# Altium PCB Power Bank Circuit.pcbdoc
Units mm, origin at the board's own origin, x right, y up, seen from the top; angles counter-clockwise.
Board outline 81.06 x 94.27 mm, 2 copper layers (Top Layer, Bottom Layer); 36 components, 26 nets, 99 pads, 28 vias.
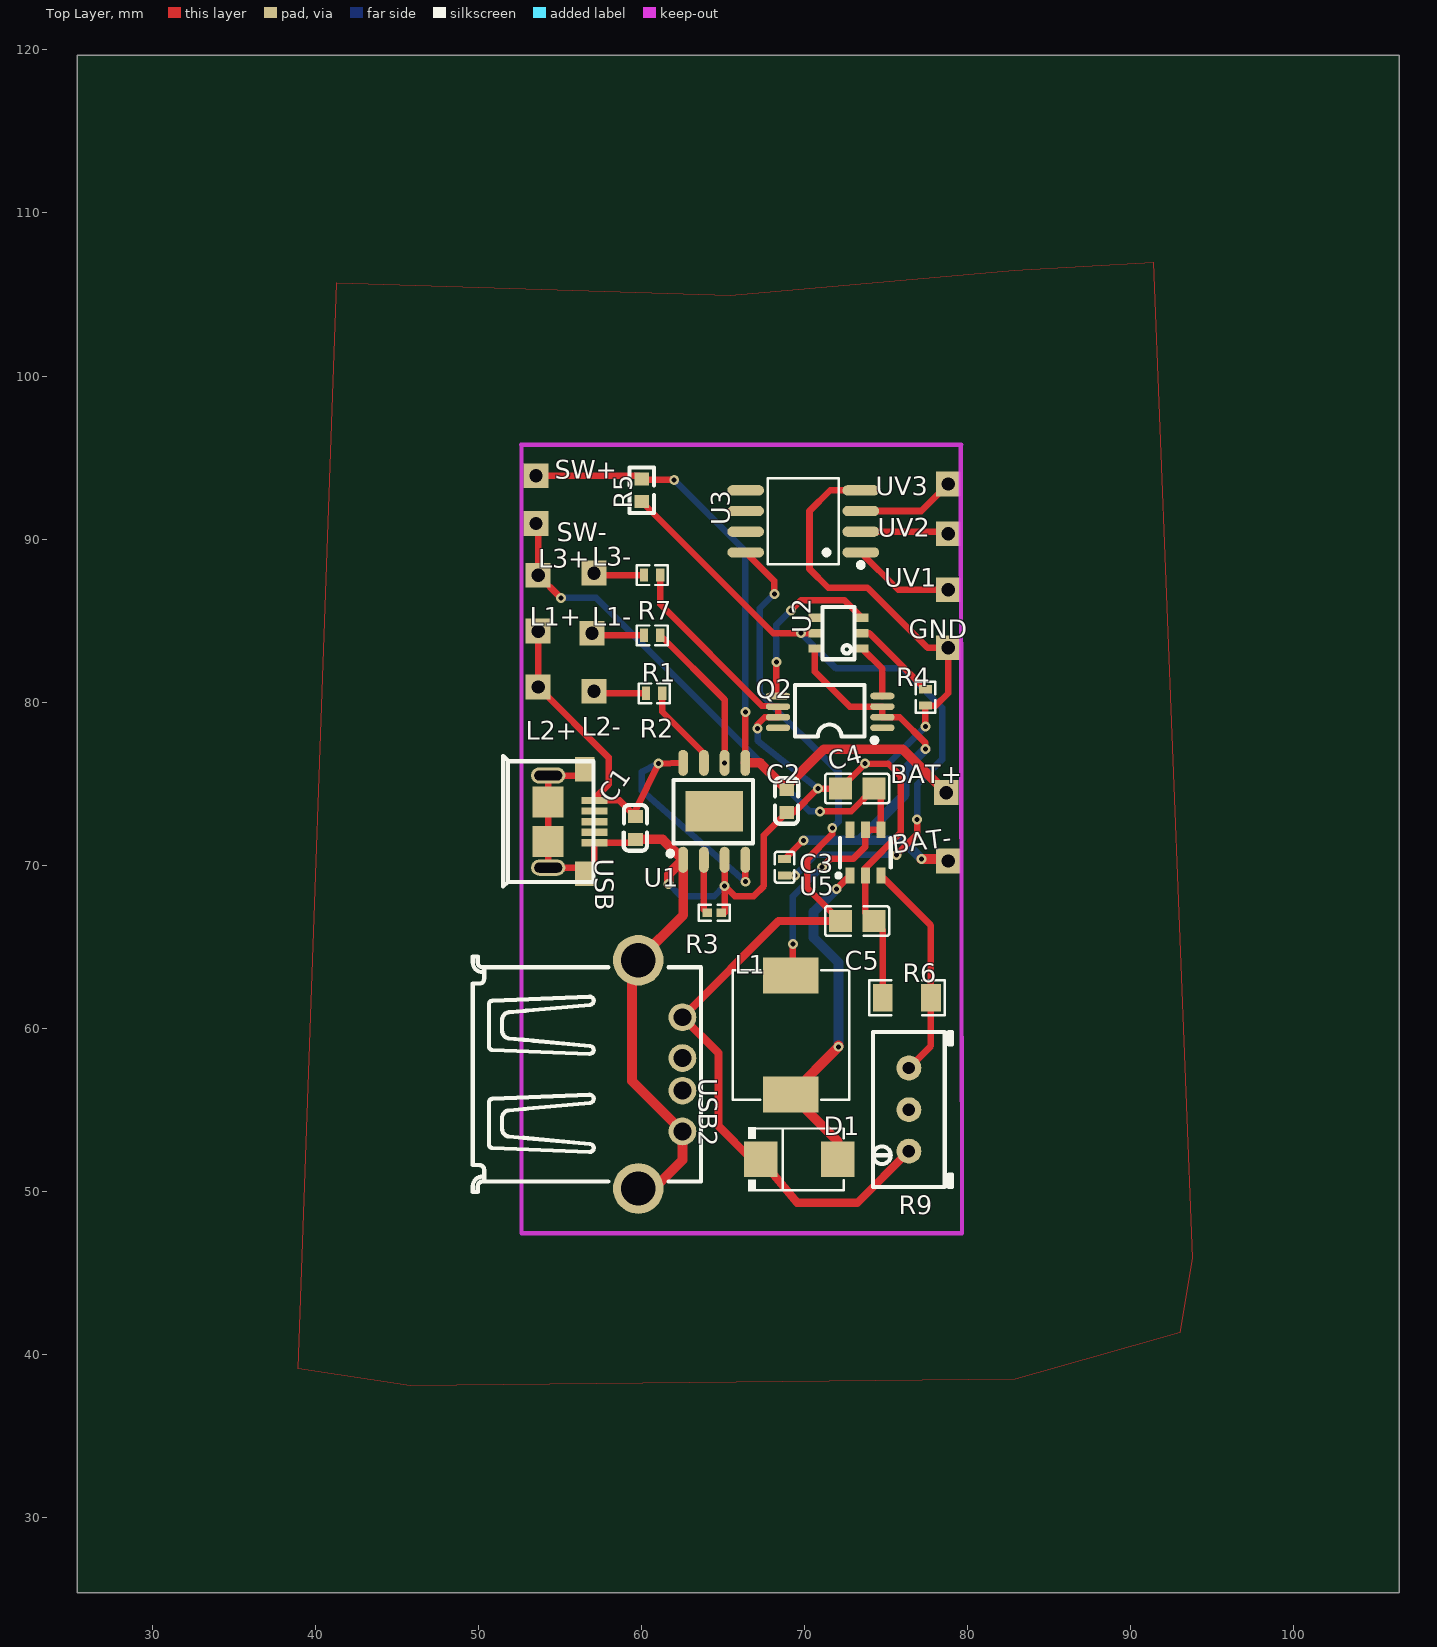
[diagram p0: Top Layer view]
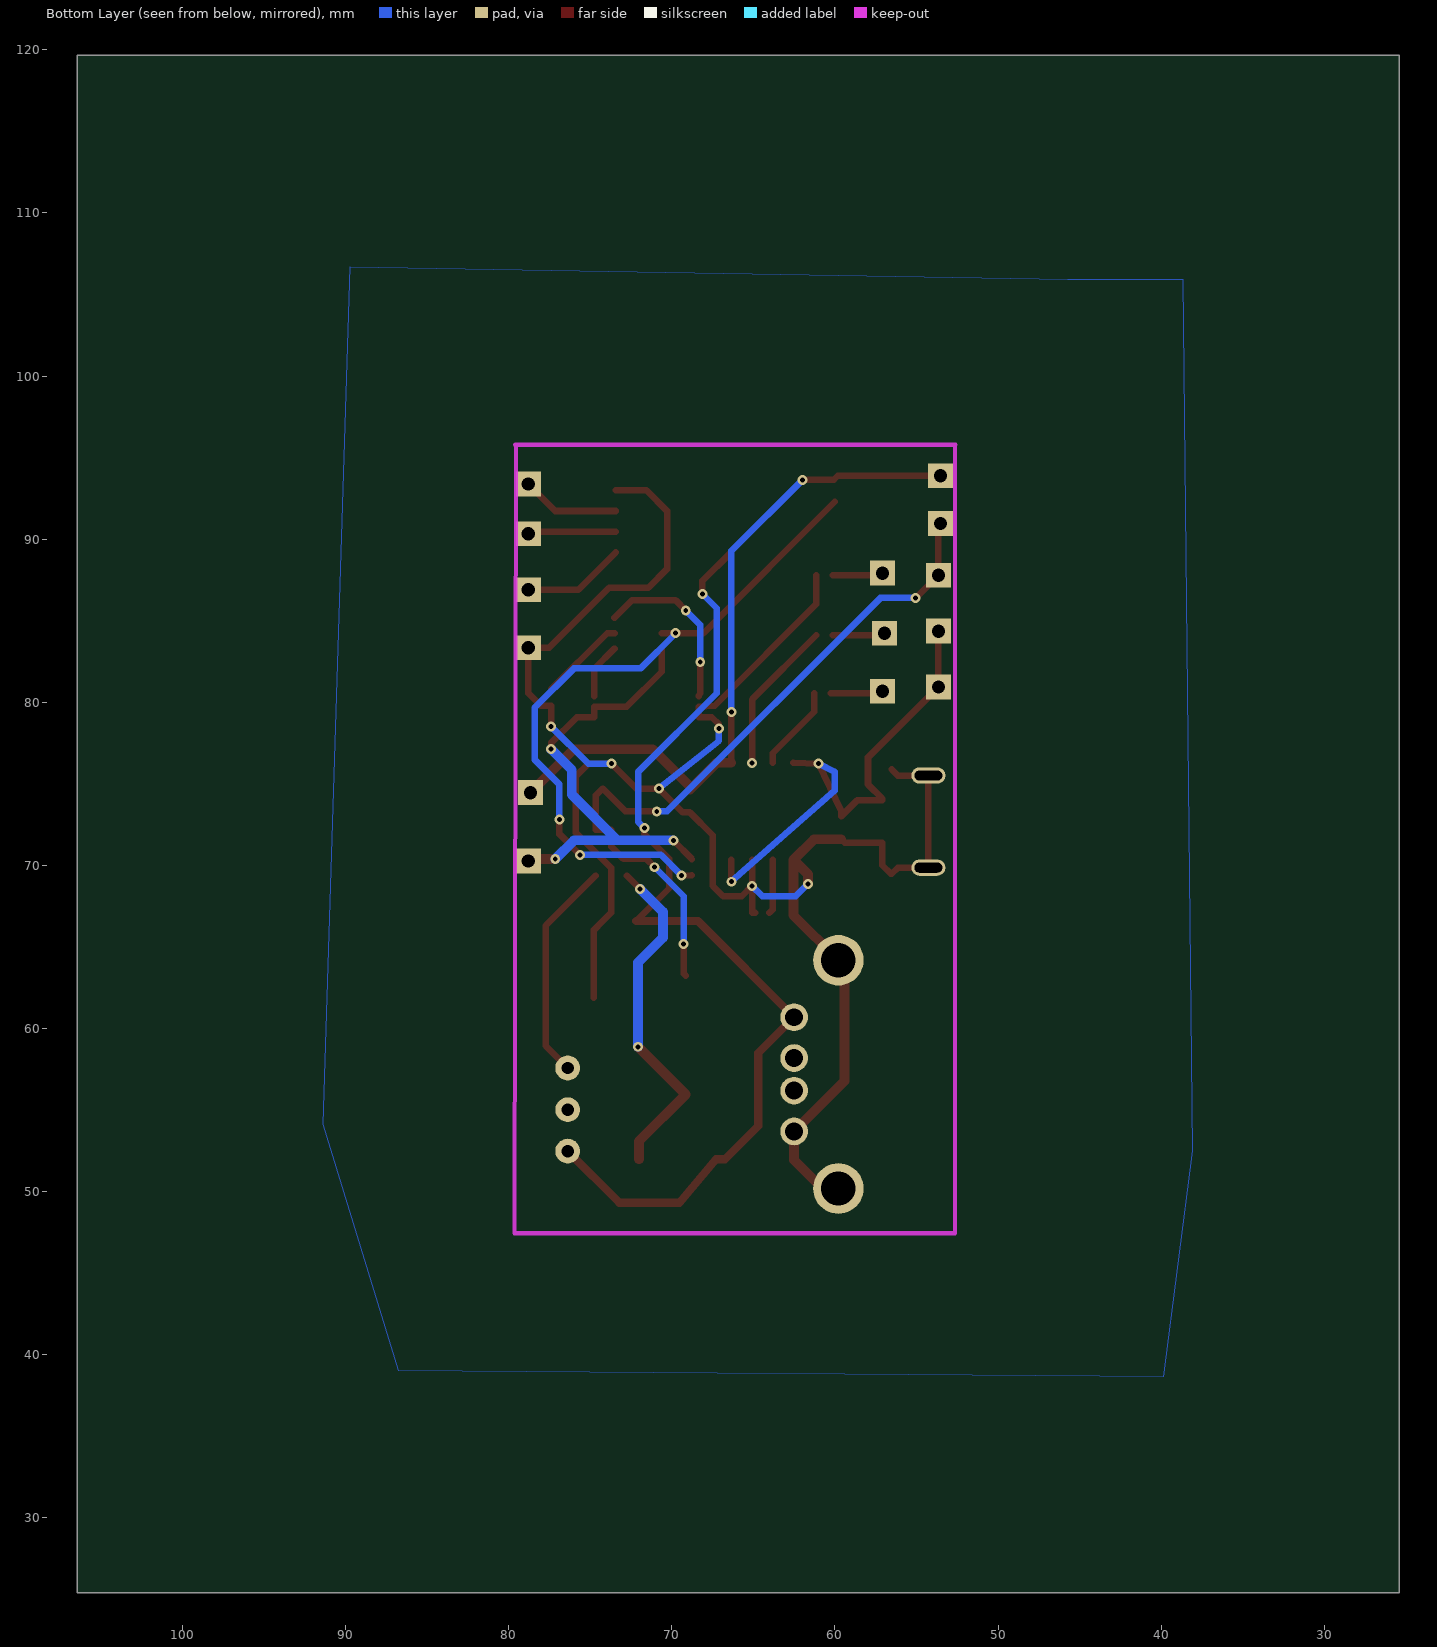
[diagram p1: Bottom Layer view, seen from below]

## Layer stack, top to bottom
Top Layer: signal copper (thickness not stored)
Dielectric: dielectric 0.32, FR-4, Dk 4.8
Bottom Layer: signal copper (thickness not stored)

## Board outline
106.458,25.4 25.4,25.4 25.4,119.666 106.458,119.666

## Components (designator, comment, footprint, x,y, rotation, side; value= is the part's Value field where it differs from the comment)
BAT+ "Pad 04" CON_PAD_SQUARE_32MIL 78.676,74.454 r0 top
BAT- "Pad 05" CON_PAD_SQUARE_32MIL 78.803,70.263 r0 top
C1 "10uF" C0603 59.627,72.295 r90 top
C2 "10uF" C0603 68.897,73.946 r90 top
C3 "100nF" C0402 68.77,69.882 r270 top
C4 "22uF" C0805 73.215,74.708 r0 top
C5 "22uF" C0805 73.215,66.58 r0 top
D1 "SS34" SMB_L4.6-W3.6-LS5.3-RD 69.659,51.975 r0 top
GND "Pad 05" CON_PAD_SQUARE_32MIL 78.803,83.344 r0 top
L1 "22uH" IND-SMD_L7.8-W7.0_MAPM0630F 69.151,59.595 r90 top
L1+ "Pad 05" CON_PAD_SQUARE_32MIL 53.657,84.36 r0 top
L1- "Pad 05" CON_PAD_SQUARE_32MIL 56.959,84.233 r0 top
L2+ "Pad 05" CON_PAD_SQUARE_32MIL 53.657,80.931 r0 top
L2- "Pad 05" CON_PAD_SQUARE_32MIL 57.087,80.677 r0 top
L3+ "Pad 05" CON_PAD_SQUARE_32MIL 53.657,87.789 r0 top
L3- "Pad 05" CON_PAD_SQUARE_32MIL 57.087,87.916 r0 top
Q2 "FS8205A" TSSOP-8_L4.4-W3.0-P0.65-LS6.4-BL-2 71.564,79.407 r90 top
R1 "1KΩ" R0402#1 60.642,84.106 r180 top
R2 "1KΩ" R0402#1 60.77,80.55 r180 top
R3 "1.2K" R0402#2 64.453,67.088 r180 top
R4 "1KΩ" R0402#1 77.406,80.296 r90 top
R5 "100Ω" R0603 60.008,92.996 r90 top
R6 "200Ω" R1206 76.263,61.881 r0 top
R7 "1KΩ" R0402#1 60.642,87.789 r180 top
R9 "10K" RES-ADJ-TH_3296W 76.391,55.023 r180 top
SW+ "Pad 05" CON_PAD_SQUARE_32MIL 53.53,93.885 r0 top
SW- "Pad 05" CON_PAD_SQUARE_32MIL 53.53,90.964 r0 top
U1 "TP4056" SOP-8_EP_150MIL 66.484,75.851 r90 top
U2 "DW01A-G" SOT-23-6 72.072,84.233 r90 top
U3 "ATTINY85V-10SU" SOIC-8_L5.3-W5.3-P1.27-LS8.0-BL 69.913,91.091 r90 top
U5 "MT3608" SOT-23-6_L2.9-W1.6-P0.95-LS2.8-BR 73.724,70.771 r270 top
USB "micro 5PBoard5.9No column plus welding feet" MICRO-USB-SMD_5P-P0.65-H-F-C40955 55.689,72.676 r270 top
USB2 "JTJ-USB-AF-08" USB-A-TH__USB-AF-90 61.151,57.182 r270 top
UV1 "Pad 05" CON_PAD_SQUARE_32MIL 78.803,86.9 r0 top
UV2 "Pad 05" CON_PAD_SQUARE_32MIL 78.803,90.329 r0 top
UV3 "Pad 05" CON_PAD_SQUARE_32MIL 78.803,93.377 r0 top

## Footprints (in the part's own frame and the unit in brackets; to place one, negate y for a bottom-side part, rotate by r counter-clockwise, add the part's x,y. Pads: shape width x height; smd on the part's side, far side on the other; paste and mask are expansions set on the pad)
C0402 [mm]
  rect 0.5x0.8 smd: 1(-0.5,0) 2(0.5,0)
  silkscreen extent -0.95,-0.6 0.95,0.6
C0603 [mm]
  rect 0.8x0.9 smd: 1(-0.7,0) 2(0.7,0)
  silkscreen extent -1.4,-0.7 1.4,0.72
C0805 [mm]
  rect 1.41x1.35 smd: 1(-1.03,0) 2(1.03,0)
  silkscreen extent -1.96,-0.9 1.96,0.9
CON_PAD_SQUARE_32MIL [mil]
  rect 60x60 hole 32: P(0,0)
IND-SMD_L7.8-W7.0_MAPM0630F [mm]
  rect 2.194x3.42 smd: 1(3.643,0) 2(-3.643,0)
  silkscreen extent -3.98,-3.58 3.98,3.58
MICRO-USB-SMD_5P-P0.65-H-F-C40955 [mm]
  rect 1.5x1.2 smd: 0(-3.2,0.834) 0(3.2,0.834)
  oval 1x2.1 hole 0.6 slot 1.7 at 90 deg: 0(-2.83,-1.416) 0(2.819,-1.416)
  rect 1.9x1.9 smd: 0(-1.201,-1.415) 0(1.204,-1.415)
  rect 0.45x1.6 smd: 1(-1.302,1.415) 2(-0.652,1.415) 3(-0.001,1.415) 4(0.649,1.415) 5(1.299,1.415)
  silkscreen extent -4.03,-4.19 3.98,1.35
R0402#1 [mm]
  rect 0.5x0.8 smd: 1(-0.5,0) 2(0.5,0)
  silkscreen extent -0.95,-0.6 0.95,0.6
R0402#2 [mm]
  rect 0.566x0.54 smd: 1(-0.433,0) 2(0.433,0)
  silkscreen extent -0.94,-0.5 0.94,0.5
R0603 [mm]
  rect 0.8x0.9 smd: 1(-0.7,0) 2(0.7,0)
  silkscreen extent -1.4,-0.75 1.4,0.76
R1206 [mm]
  rect 1.208x1.701 smd: 1(-1.479,0) 2(1.479,0)
  silkscreen extent -2.31,-1.08 2.31,1.08
RES-ADJ-TH_3296W [mil]
  round 60 hole 30: 1(0,100.39) 2(0,0.39) 3(0,-100.39)
  silkscreen extent -104,-187 87,187
SMB_L4.6-W3.6-LS5.3-RD [mm]
  rect 2.047x2.192 smd: 1(-2.361,0) 2(2.361,0)
  silkscreen extent -3.12,-1.96 2.74,1.96
SOIC-8_L5.3-W5.3-P1.27-LS8.0-BL [mm]
  oval 0.63x2.25 smd: 1(-1.905,-3.53) 2(-0.635,-3.53) 3(0.635,-3.53) 4(1.905,-3.53) 5(1.905,3.53) 6(0.635,3.53) 7(-0.635,3.53) 8(-1.905,3.53)
  silkscreen extent -2.82,-3.68 2.64,2.18
SOP-8_EP_150MIL [mm]
  oval 1.6x0.6 smd: 1(-5.512,3.937) 2(-5.512,2.667) 3(-5.512,1.397) 4(-5.512,0.127) 5(0.432,0.127) 6(0.432,1.397) 7(0.432,2.667) 8(0.432,3.937)
  rect 2.5x3.5 smd: 9(-2.54,2.032)
  silkscreen extent -5.28,-0.36 -0.61,4.87
SOT-23-6 [mil]
  rect 20.1x31.5 smd: 1(-37,-57) 2(0,-57) 3(37,-57) 4(37,57) 5(0,57) 6(-37,57)
  silkscreen extent -63,-39 63,39
SOT-23-6_L2.9-W1.6-P0.95-LS2.8-BR [mm]
  rect 1x0.55 smd: 1(1.4,-0.95) 2(1.4,0) 3(1.4,0.95) 4(-1.4,0.95) 5(-1.4,0) 6(-1.4,-0.95)
  silkscreen extent -0.9,-1.78 1.52,1.55
TSSOP-8_L4.4-W3.0-P0.65-LS6.4-BL-2 [mm]
  oval 0.4x1.5 smd: 1(-0.975,-3.2) 2(-0.325,-3.2) 3(0.325,-3.2) 4(0.975,-3.2) 5(0.975,3.2) 6(0.325,3.2) 7(-0.325,3.2) 8(-0.975,3.2)
  silkscreen extent -1.89,-2.87 1.64,2.16
USB-A-TH__USB-AF-90 [mm]
  round 1.7 hole 1.1: 1(-3.5,1.355) 2(-1,1.355) 3(1,1.355) 4(3.5,1.355)
  round 3.1 hole 2.1: SH1(7,-1.355) SH2(-7,-1.355)
  silkscreen extent -7.22,-11.51 7.22,2.49

## Via types
v1: diameter 0.61, hole 0.305, Top Layer to Bottom Layer, tented both sides, 28 vias

## Nets (pads, with @x,y where several pads share a name; then routed paths per layer and width w, separated by ;. In a path a pad name is that pad's centre, name@x,y a point inside that pad or via, vN(x,y) a via of type N, cw(c..) or ccw(c..) an arc to the next point about the centre after c; other vN are vias at no path point)
BAT-_P: BAT-.P C3.1 Q2.2 Q2.3 U2.6 | length 32.5
  Top Layer w0.4: C3.1@68.77,70.382 v1(69.913,71.533) ; U2.6 70.625,81.871 72.763,79.732 74.765,79.732 74.765,79.082 75.826,79.082 77.406,77.502 v1(77.406,77.121)
  Top Layer w0.6: v1(77.153,70.39) 78.676,70.39 BAT-.P
  Bottom Layer w0.6: v1(77.153,70.39) 76.01,71.533 v1(69.913,71.533) 73.343,71.533 76.136,74.327 76.136,75.851 v1(77.406,77.121)
C4_2: C4.2 L1.1 L3+.P SW-.P U5.4 U5.5 | length 45.8
  Top Layer w0.4: SW-.P 53.657,90.837 L3+.P v1(55.054,86.392) ; L1.1 69.278,63.365 v1(69.278,65.183) ; v1(70.929,73.311) 72.849,73.311 C4.2 74.673,74.28 U5.4 73.978,72.171 U5.5@73.724,71.917 ; v1(71.056,69.882) 71.564,70.39 72.962,70.39 73.724,71.152 U5.5
  Bottom Layer w0.4: v1(55.054,86.392) 57.213,86.392 70.294,73.311 v1(70.929,73.311) ; v1(69.278,65.183) 69.278,68.104 v1(71.056,69.882)
GND: C1.1 C2.1 C4.1 C5.2 GND.P Q2.6 Q2.7 R3.1 R4.1 R6.1 R7.1 U1.1 U1.3 U3.4 U5.2 USB2.4 USB2.SH1 USB2.SH2 USB.0 USB.5 | length 131.6
  Top Layer w0.4: USB.0@56.524,75.876 56.153,75.505 54.275,75.505 54.275,69.856 56.143,69.856 56.524,69.475 56.571,69.475 57.104,70.009 USB.5 59.408,71.377 C1.1 ; R7.1 61.143,86.018 67.373,79.788 Q2.6 68.364,79.082 67.556,79.082 67.12,78.645 v1(67.12,78.391) ; R3.1 65.087,67.088 v1(65.087,68.739) ; U1.3 v1(65.087,68.739) ; C2.1@68.897,73.245 67.501,71.848 67.501,68.739 66.865,68.104 65.722,68.104 v1(65.087,68.739) ; C2.1 69.341,73.246 v1(70.802,74.708) C4.1@72.186,74.708 ; C4.1 v1(73.708,76.232) 75.12,76.232 75.882,75.47 75.882,72.041 ; U3.4 71.564,92.996 70.294,91.726 70.294,88.17 71.438,87.027 73.85,87.027 77.534,83.344 GND.P 78.796,80.55 78.042,79.796 R4.1 v1(77.406,78.518) ; R6.1 74.785,66.041 74.245,66.58 73.724,67.102 U5.2 73.724,69.839 75.882,71.998
  Top Layer w0.6: USB2.SH1@59.414,50.182 60.755,50.182 62.506,51.933 USB2.4 59.414,56.773 USB2.SH2@59.414,64.182 ; C1.1 61.292,71.595 U1.1 ; USB2.SH2 62.547,66.934 U1.1 ; v1(61.658,68.866) 61.658,69.45 U1.1
  Bottom Layer w0.4: v1(61.658,68.866) 62.42,68.104 64.453,68.104 v1(65.087,68.739) ; v1(67.12,78.391) 67.12,77.629 v1(70.802,74.708) ; v1(73.708,76.232) 75.12,76.232 v1(77.406,78.518)
L1_2: D1.2 L1.2 U5.1 | length 21.5
  Top Layer w0.4: v1@71.945,68.485 v1(71.945,68.543) U5.1
  Top Layer w0.6: D1.2 72.02,53.083 L1.2 v1(72.072,58.873) v1@72.072,58.96
  Bottom Layer w0.6: v1(71.945,68.543) 70.549,67.146 70.549,65.564 72.072,64.04 v1(72.072,58.873)
OC: Q2.5 U2.3 | length 10.7
  Top Layer w0.4: v1(68.263,82.455) 68.263,80.55 Q2.5@68.364,80.382 ; v1(69.151,85.63) 69.787,86.265 72.428,86.265 U2.3
  Bottom Layer w0.4: v1(68.263,82.455) 68.263,84.741 v1(69.151,85.63)
OD: Q2.4 U2.1 | length 3.4
  Top Layer w0.4: U2.1 74.765,82.048 Q2.4@74.765,80.382
OUT+: BAT+.P C2.2 R5.2 SW+.P U1.5 | length 43
  Top Layer w0.4: SW+.P 59.819,93.885 R5.2 60.073,93.631 v1@62,93.631 ; U1.5@66.358,76.232 v1@66.358,79.356
  Top Layer w0.6: U1.5 67.261,76.283 C2.2 ; C2.2 68.897,74.835 71.183,77.121 76.01,77.121 BAT+.P
  Bottom Layer w0.4: v1@62,93.631 66.358,89.273 v1(66.358,79.407)
  other v1: 62,93.631
R1_2: L1-.P R1.2 | length 3.2
  Top Layer w0.4: L1-.P 57.087,84.106 R1.2
R2_2: L2-.P R2.2 | length 3.2
  Top Layer w0.4: L2-.P 57.214,80.55 R2.2
R7_2: L3-.P R7.2 | length 3.1
  Top Layer w0.4: L3-.P 57.214,87.789 R7.2
R9_2: R9.2
R9_3: R6.2 R9.3 U5.3 | length 13.6
  Top Layer w0.4: U5.3 77.742,66.302 R6.2 77.742,58.925 R9.3
S$68: 
U1_2: R3.2 U1.2 | length 3.3
  Top Layer w0.4: U1.2 63.817,67.29 R3.2
U1_4: C1.2 L1+.P L2+.P U1.4 U1.8 USB.1 | length 32.6
  Top Layer w0.4: L1+.P L2+.P 57.975,76.613 57.975,74.962 57.104,74.091 USB.1 58.644,73.977 C1.2 ; C1.2 59.627,73.362 v1(61.023,76.232) U1.8 ; v1(66.358,68.993) U1.4
  Bottom Layer w0.4: v1(61.023,76.232) 60.008,75.724 60.008,74.581 v1(66.358,68.993)
U1_6: R1.1 U1.6 | length 9.5
  Top Layer w0.4: R1.1 65.087,80.161 v1(65.087,76.283)
U1_7: R2.1 U1.7 | length 5.3
  Top Layer w0.4: R2.1 61.27,79.414 63.817,76.867 U1.7
U2_2: R4.2 U2.2 | length 5.3
  Top Layer w0.4: U2.2 73.969,84.233 R4.2
U2_5: C3.2 R5.1 U2.5 | length 42.1
  Top Layer w0.4: R5.1 68.071,84.233 v1(69.766,84.233) U2.5 ; C3.2 v1(69.406,69.374) ; v1(75.629,70.644) 76.898,71.914 v1(76.898,72.803)
  Bottom Layer w0.4: v1(69.406,69.374) 70.675,70.644 v1(75.629,70.644) ; v1(69.766,84.233) 71.925,82.074 76.01,82.074 78.422,79.661 78.422,76.486 76.898,74.962 v1(76.898,72.803)
U3_1: U3.1 UV1.P | length 6.3
  Top Layer w0.4: U3.1 75.73,86.9 UV1.P
U3_2: U3.2 UV2.P | length 5.5
  Top Layer w0.4: U3.2 78.803,90.456 UV2.P
U3_3: U3.3 UV3.P | length 6
  Top Layer w0.4: U3.3 77.153,91.726 UV3.P
U3_5: U3.5
U3_6: U3.6
U3_7: U3.7
VCC: C5.1 D1.1 R9.1 U3.8 USB2.1 | length 62.1
  Top Layer w0.4: U3.8 68.135,87.434 v1(68.135,86.646) ; v1(71.691,72.295) 71.691,71.914 70.168,70.39 70.168,68.598 C5.1@72.186,66.58
  Top Layer w0.5: D1.1 66.739,51.975 64.706,54.007 64.706,58.481 USB2.1 68.403,66.58 C5.1 ; D1.1 69.532,49.308 73.226,49.308 R9.1@76.391,52.473
  Bottom Layer w0.4: v1(68.135,86.646) 67.246,85.757 67.246,80.55 72.072,75.724 72.072,72.676 v1(71.691,72.295)
pads on no net: Q2.1 Q2.8 U1.9 U2.4 U5.6 USB2.2 USB2.3 USB.2 USB.3 USB.4

## Polygon pours and split planes (outlines as drawn)
GND on Bottom Layer (solid): 89.725,106.712 45.72,105.95 38.672,105.95 38.1,52.483 39.878,38.64 86.741,39.021 91.376,54.134
GND on Top Layer (solid): 41.307,105.727 65.437,104.965 82.836,106.489 91.376,106.966 93.758,45.91 92.996,41.338 82.899,38.481 45.815,38.1 38.957,39.116